# EAGLE board 32U4_Breakout-Panel-v12 (EAGLE 6.5.0), part 1 of 3
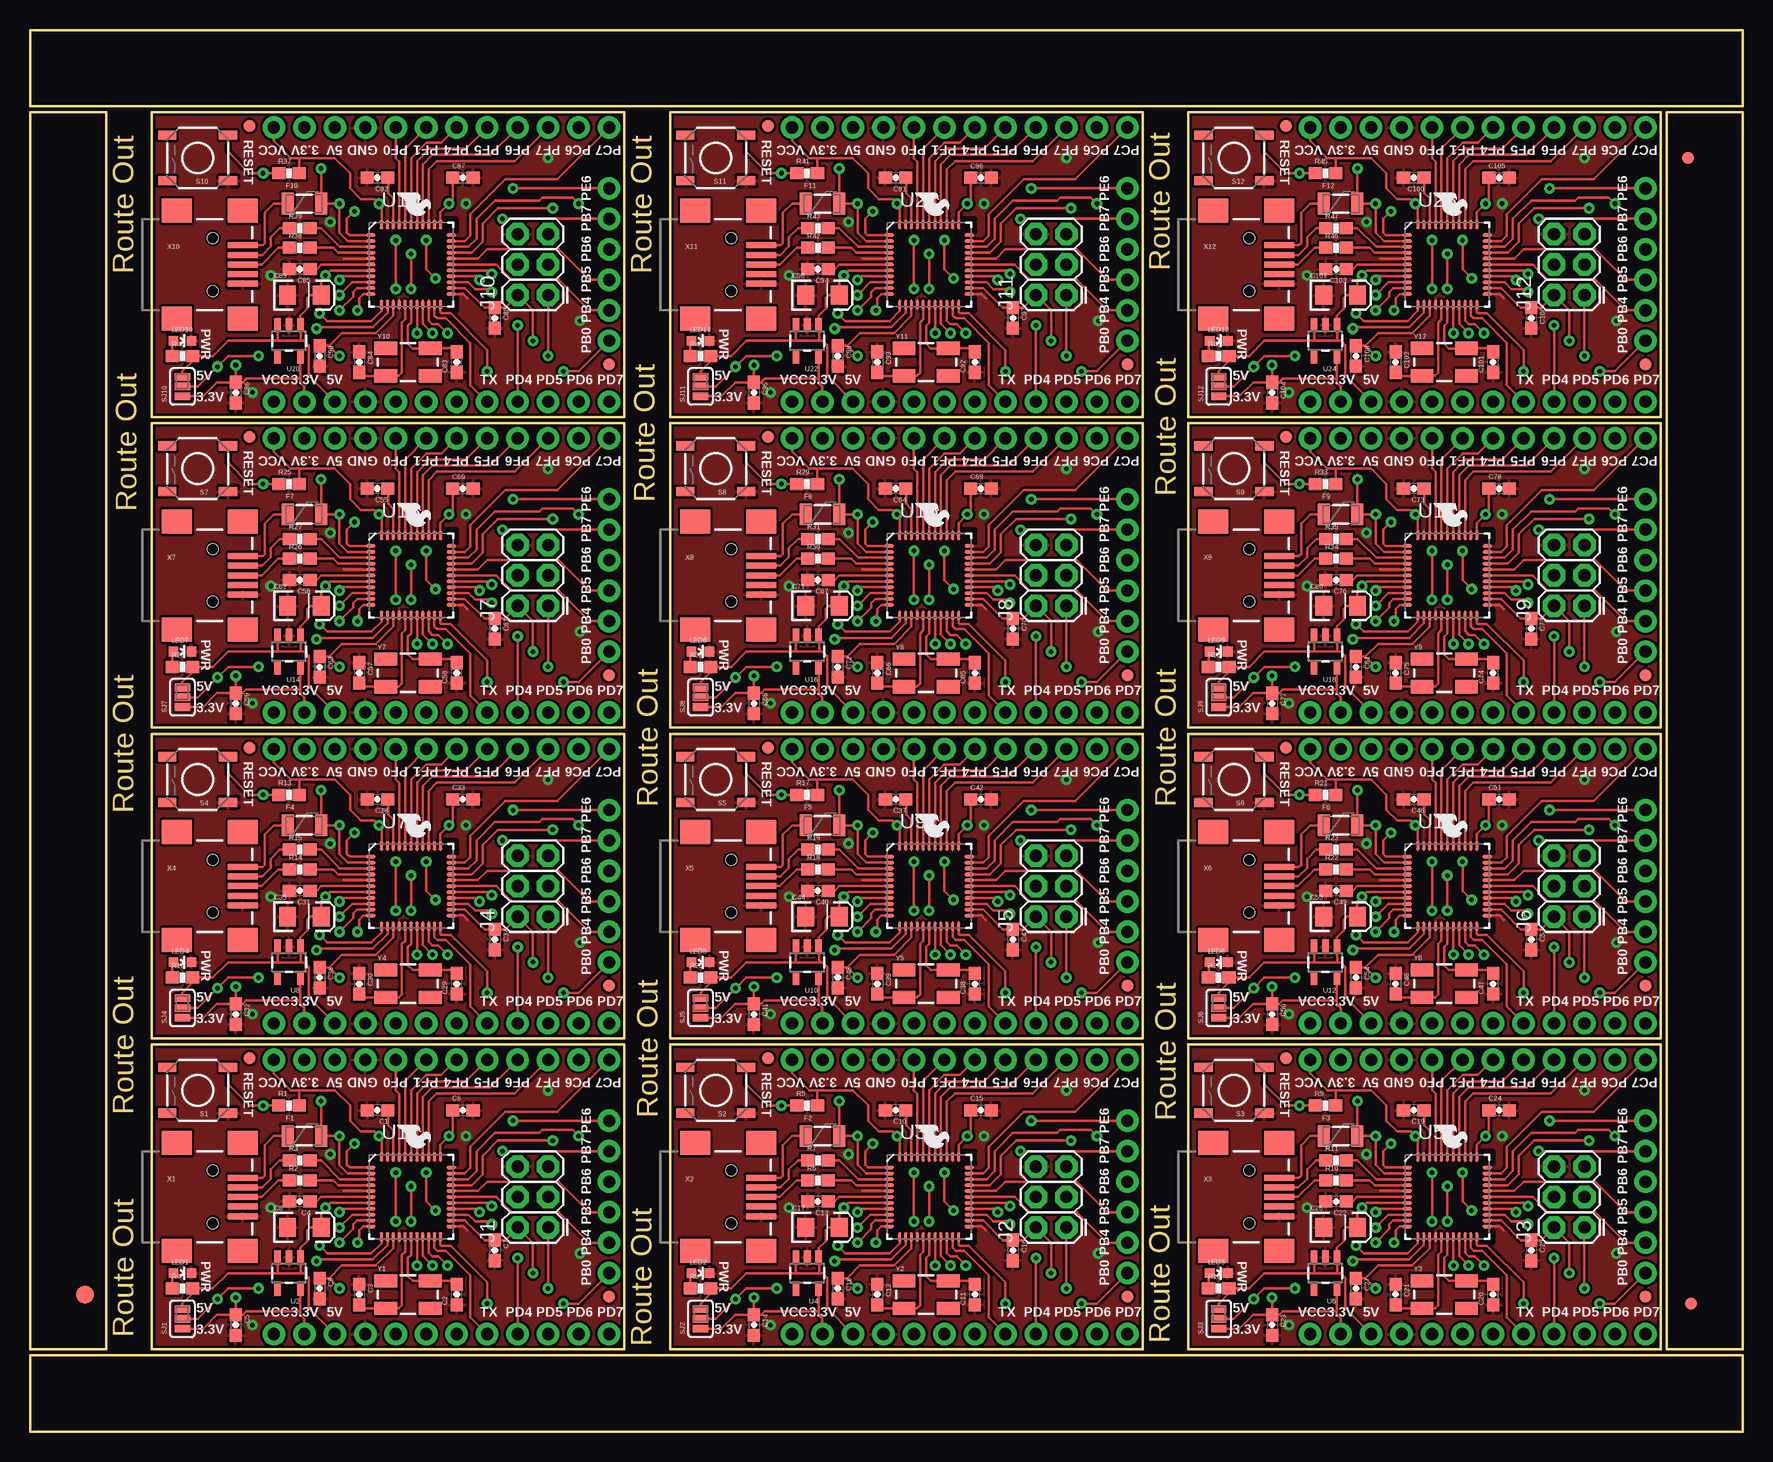
[diagram p0: board, top side]
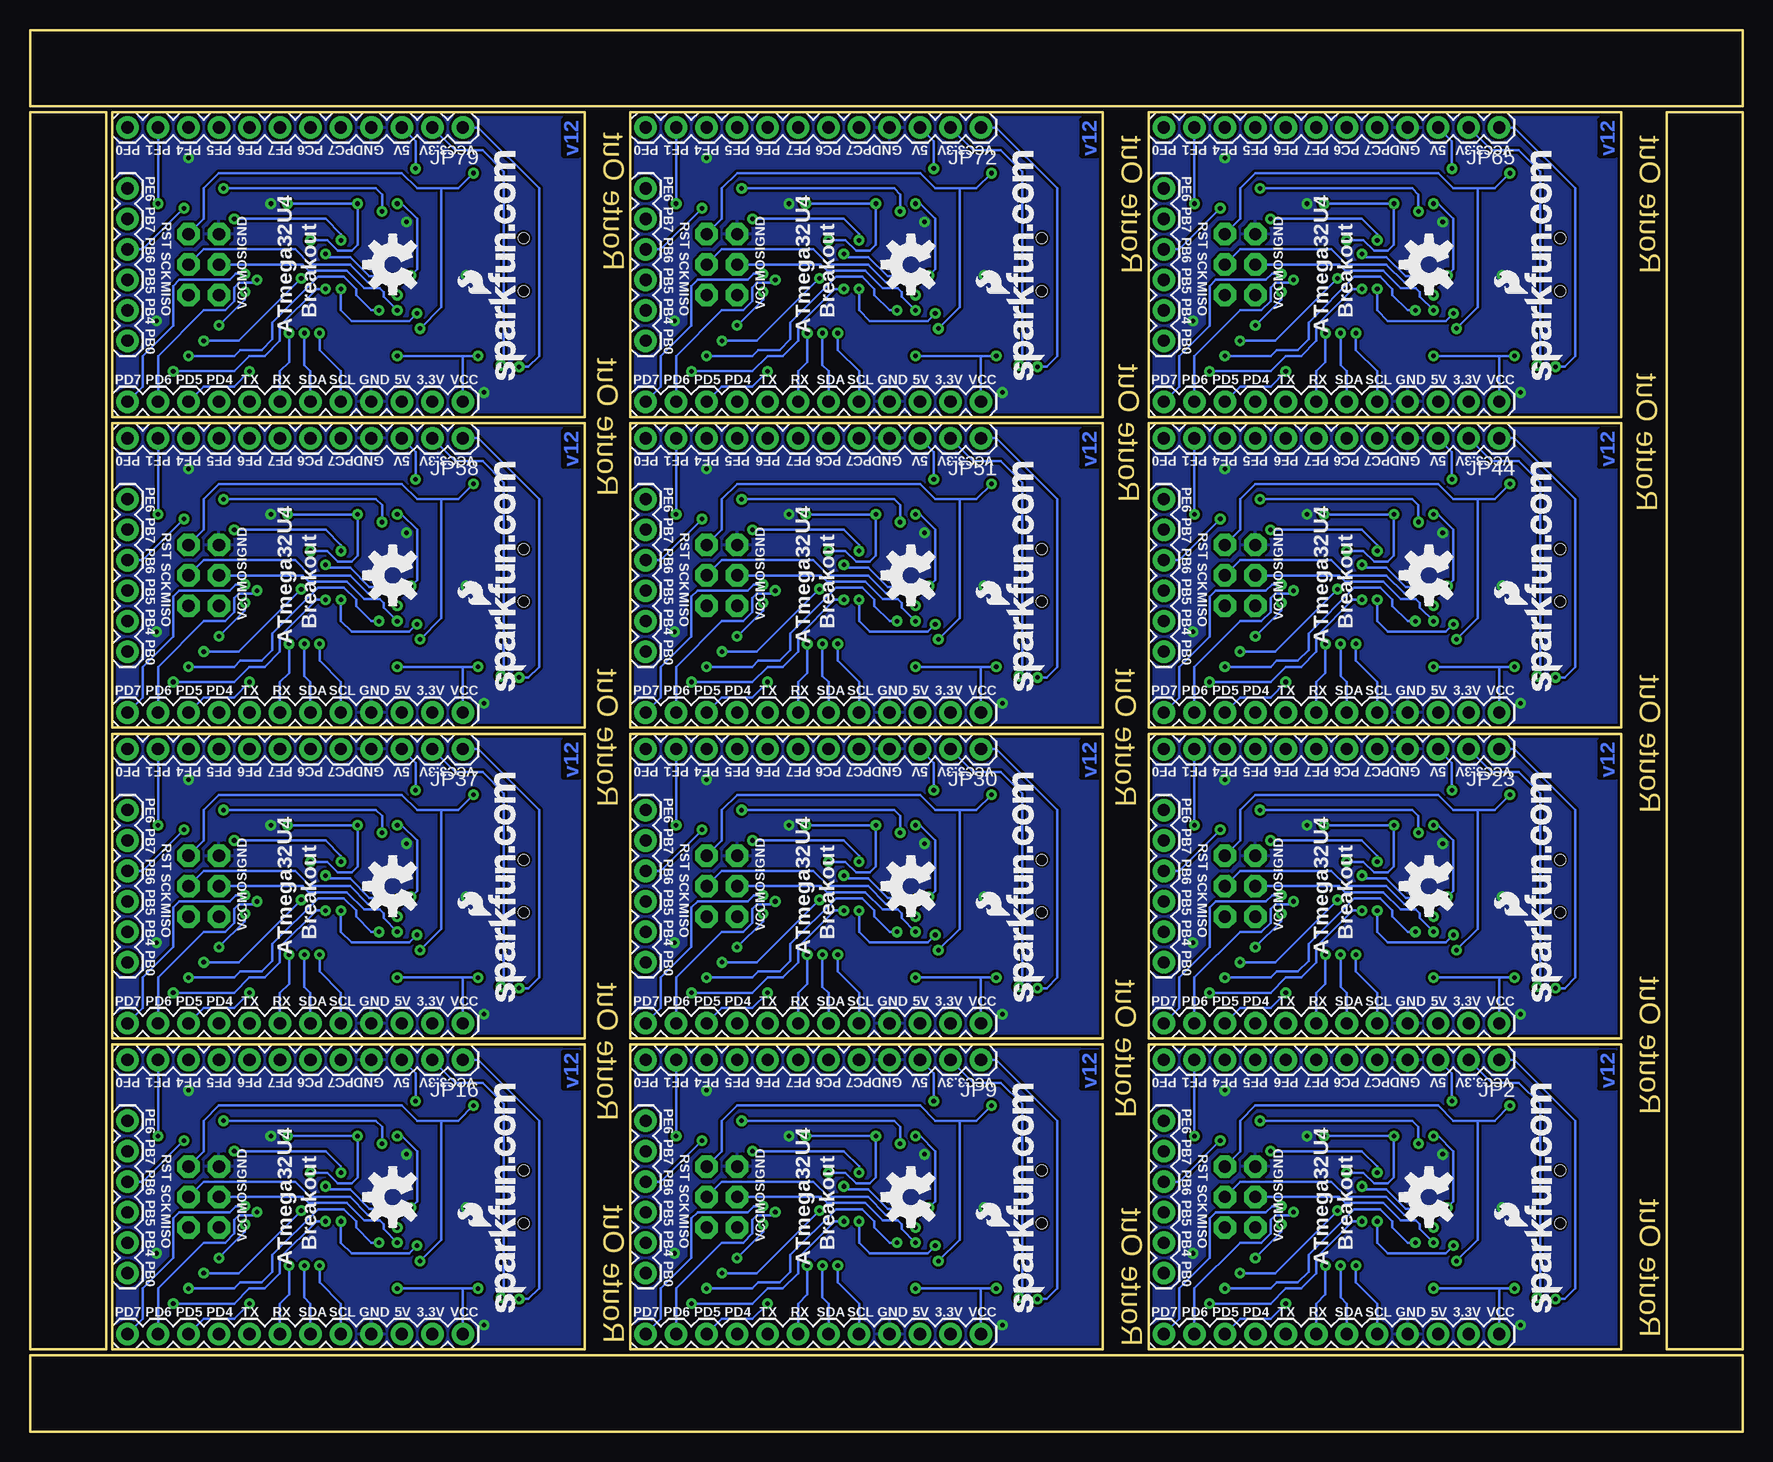
[diagram p1: board, bottom side, seen from below]

Size 142.75 x 116.84 mm. Coordinates in mm from the lower left corner, seen from the top.
Outline: 66 segments
Copper layers (1*16): Top 0.035mm / dielectric 1.5mm / Bottom 0.035mm
Design rules "SparkFun": minimum track width 7mil, minimum drill 15mil, track to track 8mil, track to pad 8mil, pad to pad 8mil, via to via 8mil, smd to smd 8mil, copper to edge 8mil, drill to drill 8mil, minimum pad ring 12mil, minimum via ring 10mil, stop-mask expansion 4mil, vias tented up to drill 20mil, thermal gap 10mil
tRestrict: area 34.5,22.4 to 35.6,23.4; area 29.6,22.2 to 30,22.4; area 33.5,22.2 to 33.9,22.4; area 34.4,21.8 to 34.5,22.2; area 28.8,19.8 to 29,20.3; area 34.5,15.7 to 35.6,16.8; area 27.9,15.7 to 29,16.8; area 27.9,22.4 to 29,23.4; area 34.4,17 to 34.5,17.3; area 77.7,22.4 to 78.7,23.4; area 72.8,22.2 to 73.2,22.4; area 76.7,22.2 to 77.1,22.4; 96 more areas

## Footprints (pad centres in the part's own frame; a part is rotated, then mirrored left to right if it is on the bottom)
0603-CAP = smd 1.1 x 1: 1 -0.85,0; 2 0.85,0
EIA3216 = smd 1.4 x 1.6: A 1.4,0; C -1.4,0
FIDUCIAL-1.5X3 = smd 1.5 x 1.5: 1 0,0
FIDUCIAL-1X2 = smd 1 x 1: 1 0,0
PTC-1206 = smd 1 x 1.8: 1 -1.4,0; 2 1.4,0
2X3 = drill 1.016 pad 1.88 octagon: 1 0,0; 2 0,2.54; 3 2.54,0; 4 2.54,2.54; 5 5.08,0; 6 5.08,2.54
1X12 = drill 1.016 pad 1.88: 1 0,0; 2 2.54,0; 3 5.08,0; 4 7.62,0; 5 10.16,0; 6 12.7,0; 7 15.24,0; 8 17.78,0; 9 20.32,0; 10 22.86,0; 11 25.4,0; 12 27.94,0
1X06 = drill 1.016 pad 1.88: 1 0,0; 2 2.54,0; 3 5.08,0; 4 7.62,0; 5 10.16,0; 6 12.7,0
LED-0603 = smd 0.8 x 0.8: A 0,-0.75; C 0,0.75
0603-RES = smd 1.1 x 1: 1 -0.85,0; 2 0.85,0
TACTILE_SWITCH_SMD = smd 1.524 x 0.762: 1 -2.54,1.905; 2 2.54,1.905; 3 -2.54,-1.905; 4 2.54,-1.905
SJ_3_PASTE2&3 = smd 0.635 x 1.27: 1 -0.813,0; 2 0,0; 3 0.813,0
QFN-44-NOPAD_1:1-LESS_PASTE = smd 0.8 x 0.3: 1 -3.337,2.458; 2 -3.337,1.958; 3 -3.337,1.479; 4 -3.337,0.979; 5 -3.337,0.5; 6 -3.337,0; 7 -3.337,-0.5; 8 -3.337,-0.979; 9 -3.337,-1.479; 10 -3.337,-1.958; 11 -3.337,-2.458; 23 3.337,-2.458; 24 3.337,-1.958; 25 3.337,-1.479; 26 3.337,-0.979; 27 3.337,-0.5; 28 3.337,0; 29 3.337,0.5; 30 3.337,0.979; 31 3.337,1.479; 32 3.337,1.958; 33 3.337,2.458 | smd 0.3 x 0.8: 12 -2.458,-3.337; 13 -1.958,-3.337; 14 -1.479,-3.337; 15 -0.979,-3.337; 16 -0.5,-3.337; 17 0,-3.337; 18 0.5,-3.337; 19 0.979,-3.337; 20 1.479,-3.337; 21 1.958,-3.337; 22 2.458,-3.337; 34 2.458,3.337; 35 1.958,3.337; 36 1.479,3.337; 37 0.979,3.337; 38 0.5,3.337; 39 0,3.337; 40 -0.5,3.337; 41 -0.979,3.337; 42 -1.479,3.337; 43 -1.958,3.337; 44 -2.458,3.337
SOT23-5 = smd 0.55 x 1.2: 1 -0.95,-1.3; 2 0,-1.3; 3 0.95,-1.3; 4 0.95,1.3; 5 -0.95,1.3
USB-MINIB = smd 2.5 x 0.5: D+ 2.5,0; D- 2.5,0.8; GND 2.5,-1.6; ID 2.5,-0.8; VBUS 2.5,1.6 | smd 2.5 x 2: MTN1 -3,4.5; MTN2 2.5,4.5; MTN3 -3,-4.5; MTN4 2.5,-4.5 | hole 0.9: 0,2.2; 0,-2.2
CRYSTAL-SMD-5X3 = smd 1.9 x 1.1: 1 -1.85,-1.15; 2 1.85,-1.15; 3 1.85,1.15; 4 -1.85,1.15

## Placement (x,y rotation side)
C1  0.1uF  [0603-CAP]  28.96,26.8 180 top
C2  18pF  [0603-CAP]  35.56,11.43 90 top
C3  18pF  [0603-CAP]  27.43,11.43 270 top
C4  1uF  [0603-CAP]  22.48,19.18 180 top
C5  1uF  [0603-CAP]  17.14,8.89 270 top
C6  0.1uF  [0603-CAP]  36.07,26.8 0 top
C7  0.1uF  [0603-CAP]  38.73,15.11 270 top
C8  10uF  [EIA3216]  22.86,17.02 0 top
C9  0.1uF  [0603-CAP]  24.13,11.94 270 top
C10  0.1uF  [0603-CAP]  72.14,26.8 180 top
C11  18pF  [0603-CAP]  78.74,11.43 90 top
C12  18pF  [0603-CAP]  70.61,11.43 270 top
C13  1uF  [0603-CAP]  65.66,19.18 180 top
C14  1uF  [0603-CAP]  60.33,8.89 270 top
C15  0.1uF  [0603-CAP]  79.25,26.8 0 top
C16  0.1uF  [0603-CAP]  81.92,15.11 270 top
C17  10uF  [EIA3216]  66.04,17.02 0 top
C18  0.1uF  [0603-CAP]  67.31,11.94 270 top
C19  0.1uF  [0603-CAP]  115.32,26.8 180 top
C20  18pF  [0603-CAP]  121.92,11.43 90 top
C21  18pF  [0603-CAP]  113.79,11.43 270 top
C22  1uF  [0603-CAP]  108.84,19.18 180 top
C23  1uF  [0603-CAP]  103.5,8.89 270 top
C24  0.1uF  [0603-CAP]  122.43,26.8 0 top
C25  0.1uF  [0603-CAP]  125.09,15.11 270 top
C26  10uF  [EIA3216]  109.22,17.02 0 top
C27  0.1uF  [0603-CAP]  110.49,11.94 270 top
C28  0.1uF  [0603-CAP]  28.96,52.7 180 top
C29  18pF  [0603-CAP]  35.56,37.34 90 top
C30  18pF  [0603-CAP]  27.43,37.34 270 top
C31  1uF  [0603-CAP]  22.48,45.09 180 top
C32  1uF  [0603-CAP]  17.14,34.8 270 top
C33  0.1uF  [0603-CAP]  36.07,52.7 0 top
C34  0.1uF  [0603-CAP]  38.73,41.02 270 top
C35  10uF  [EIA3216]  22.86,42.93 0 top
C36  0.1uF  [0603-CAP]  24.13,37.85 270 top
C37  0.1uF  [0603-CAP]  72.14,52.7 180 top
C38  18pF  [0603-CAP]  78.74,37.34 90 top
C39  18pF  [0603-CAP]  70.61,37.34 270 top
C40  1uF  [0603-CAP]  65.66,45.09 180 top
C41  1uF  [0603-CAP]  60.33,34.8 270 top
C42  0.1uF  [0603-CAP]  79.25,52.7 0 top
C43  0.1uF  [0603-CAP]  81.92,41.02 270 top
C44  10uF  [EIA3216]  66.04,42.93 0 top
C45  0.1uF  [0603-CAP]  67.31,37.85 270 top
C46  0.1uF  [0603-CAP]  115.32,52.7 180 top
C47  18pF  [0603-CAP]  121.92,37.34 90 top
C48  18pF  [0603-CAP]  113.79,37.34 270 top
C49  1uF  [0603-CAP]  108.84,45.09 180 top
C50  1uF  [0603-CAP]  103.5,34.8 270 top
C51  0.1uF  [0603-CAP]  122.43,52.7 0 top
C52  0.1uF  [0603-CAP]  125.09,41.02 270 top
C53  10uF  [EIA3216]  109.22,42.93 0 top
C54  0.1uF  [0603-CAP]  110.49,37.85 270 top
C55  0.1uF  [0603-CAP]  28.96,78.61 180 top
C56  18pF  [0603-CAP]  35.56,63.25 90 top
C57  18pF  [0603-CAP]  27.43,63.25 270 top
C58  1uF  [0603-CAP]  22.48,70.99 180 top
C59  1uF  [0603-CAP]  17.14,60.71 270 top
C60  0.1uF  [0603-CAP]  36.07,78.61 0 top
C61  0.1uF  [0603-CAP]  38.73,66.93 270 top
C62  10uF  [EIA3216]  22.86,68.83 0 top
C63  0.1uF  [0603-CAP]  24.13,63.75 270 top
C64  0.1uF  [0603-CAP]  72.14,78.61 180 top
C65  18pF  [0603-CAP]  78.74,63.25 90 top
C66  18pF  [0603-CAP]  70.61,63.25 270 top
C67  1uF  [0603-CAP]  65.66,70.99 180 top
C68  1uF  [0603-CAP]  60.33,60.71 270 top
C69  0.1uF  [0603-CAP]  79.25,78.61 0 top
C70  0.1uF  [0603-CAP]  81.92,66.93 270 top
C71  10uF  [EIA3216]  66.04,68.83 0 top
C72  0.1uF  [0603-CAP]  67.31,63.75 270 top
C73  0.1uF  [0603-CAP]  115.32,78.61 180 top
C74  18pF  [0603-CAP]  121.92,63.25 90 top
C75  18pF  [0603-CAP]  113.79,63.25 270 top
C76  1uF  [0603-CAP]  108.84,70.99 180 top
C77  1uF  [0603-CAP]  103.5,60.71 270 top
C78  0.1uF  [0603-CAP]  122.43,78.61 0 top
C79  0.1uF  [0603-CAP]  125.09,66.93 270 top
C80  10uF  [EIA3216]  109.22,68.83 0 top
C81  0.1uF  [0603-CAP]  110.49,63.75 270 top
C82  0.1uF  [0603-CAP]  28.96,104.52 180 top
C83  18pF  [0603-CAP]  35.56,89.15 90 top
C84  18pF  [0603-CAP]  27.43,89.15 270 top
C85  1uF  [0603-CAP]  22.48,96.9 180 top
C86  1uF  [0603-CAP]  17.14,86.61 270 top
C87  0.1uF  [0603-CAP]  36.07,104.52 0 top
C88  0.1uF  [0603-CAP]  38.73,92.84 270 top
C89  10uF  [EIA3216]  22.86,94.74 0 top
C90  0.1uF  [0603-CAP]  24.13,89.66 270 top
C91  0.1uF  [0603-CAP]  72.14,104.52 180 top
C92  18pF  [0603-CAP]  78.74,89.15 90 top
C93  18pF  [0603-CAP]  70.61,89.15 270 top
C94  1uF  [0603-CAP]  65.66,96.9 180 top
C95  1uF  [0603-CAP]  60.33,86.61 270 top
C96  0.1uF  [0603-CAP]  79.25,104.52 0 top
C97  0.1uF  [0603-CAP]  81.92,92.84 270 top
C98  10uF  [EIA3216]  66.04,94.74 0 top
C99  0.1uF  [0603-CAP]  67.31,89.66 270 top
C100  0.1uF  [0603-CAP]  115.32,104.52 180 top
C101  18pF  [0603-CAP]  121.92,89.15 90 top
C102  18pF  [0603-CAP]  113.79,89.15 270 top
C103  1uF  [0603-CAP]  108.84,96.9 180 top
C104  1uF  [0603-CAP]  103.5,86.61 270 top
C105  0.1uF  [0603-CAP]  122.43,104.52 0 top
C106  0.1uF  [0603-CAP]  125.09,92.84 270 top
C107  10uF  [EIA3216]  109.22,94.74 0 top
C108  0.1uF  [0603-CAP]  110.49,89.66 270 top
E$1  [FIDUCIAL-1.5X3]  4.57,11.43 0 top
E$4  [FIDUCIAL-1X2]  138.43,10.67 0 top
E$5  [FIDUCIAL-1X2]  138.18,106.17 180 top
F1  PTCSMD  [PTC-1206]  22.86,24.64 0 top
F2  PTCSMD  [PTC-1206]  66.04,24.64 0 top
F3  PTCSMD  [PTC-1206]  109.22,24.64 0 top
F4  PTCSMD  [PTC-1206]  22.86,50.55 0 top
F5  PTCSMD  [PTC-1206]  66.04,50.55 0 top
F6  PTCSMD  [PTC-1206]  109.22,50.55 0 top
F7  PTCSMD  [PTC-1206]  22.86,76.45 0 top
F8  PTCSMD  [PTC-1206]  66.04,76.45 0 top
F9  PTCSMD  [PTC-1206]  109.22,76.45 0 top
F10  PTCSMD  [PTC-1206]  22.86,102.36 0 top
F11  PTCSMD  [PTC-1206]  66.04,102.36 0 top
F12  PTCSMD  [PTC-1206]  109.22,102.36 0 top
J1  AVR_SPI_PRG  [2X3]  43.18,17.02 90 top
J2  AVR_SPI_PRG  [2X3]  86.36,17.02 90 top
J3  AVR_SPI_PRG  [2X3]  129.54,17.02 90 top
J4  AVR_SPI_PRG  [2X3]  43.18,42.93 90 top
J5  AVR_SPI_PRG  [2X3]  86.36,42.93 90 top
J6  AVR_SPI_PRG  [2X3]  129.54,42.93 90 top
J7  AVR_SPI_PRG  [2X3]  43.18,68.83 90 top
J8  AVR_SPI_PRG  [2X3]  86.36,68.83 90 top
J9  AVR_SPI_PRG  [2X3]  129.54,68.83 90 top
J10  AVR_SPI_PRG  [2X3]  43.18,94.74 90 top
J11  AVR_SPI_PRG  [2X3]  86.36,94.74 90 top
J12  AVR_SPI_PRG  [2X3]  129.54,94.74 90 top
JP1  M12PTH  [1X12]  20.32,8.13 180 bottom
JP2  M12PTH  [1X12]  20.32,30.99 180 bottom
JP3  [1X06]  48.26,13.21 90 bottom
JP4  M12PTH  [1X12]  63.5,8.13 180 bottom
JP5  LOGO-SFESK  [SFE-LOGO-FLAME]  30.61,25.53 270 top
JP6  FIDUCIAL1X2  [FIDUCIAL-1X2]  18.3,31.11 0 top
JP7  FIDUCIAL1X2  [FIDUCIAL-1X2]  48.26,11.25 0 top
JP8  LOGO-SFENEW  [SFE-NEW-WEBLOGO]  15.05,9.96 90 bottom
JP9  M12PTH  [1X12]  63.5,30.99 180 bottom
JP10  [1X06]  91.44,13.21 90 bottom
JP11  LOGO-SFESK  [SFE-LOGO-FLAME]  73.79,25.53 270 top
JP12  FIDUCIAL1X2  [FIDUCIAL-1X2]  61.48,31.11 0 top
JP13  FIDUCIAL1X2  [FIDUCIAL-1X2]  91.44,11.25 0 top
JP14  LOGO-SFENEW  [SFE-NEW-WEBLOGO]  58.23,9.96 90 bottom
JP15  M12PTH  [1X12]  106.68,8.13 180 bottom
JP16  M12PTH  [1X12]  106.68,30.99 180 bottom
JP17  [1X06]  134.62,13.21 90 bottom
JP18  LOGO-SFESK  [SFE-LOGO-FLAME]  116.97,25.53 270 top
JP19  FIDUCIAL1X2  [FIDUCIAL-1X2]  104.66,31.11 0 top
JP20  FIDUCIAL1X2  [FIDUCIAL-1X2]  134.62,11.25 0 top
JP21  LOGO-SFENEW  [SFE-NEW-WEBLOGO]  101.41,9.96 90 bottom
JP22  M12PTH  [1X12]  20.32,34.04 180 bottom
JP23  M12PTH  [1X12]  20.32,56.9 180 bottom
JP24  [1X06]  48.26,39.12 90 bottom
JP25  LOGO-SFESK  [SFE-LOGO-FLAME]  30.61,51.44 270 top
JP26  FIDUCIAL1X2  [FIDUCIAL-1X2]  18.3,57.02 0 top
JP27  FIDUCIAL1X2  [FIDUCIAL-1X2]  48.26,37.16 0 top
JP28  LOGO-SFENEW  [SFE-NEW-WEBLOGO]  15.05,35.86 90 bottom
JP29  M12PTH  [1X12]  63.5,34.04 180 bottom
JP30  M12PTH  [1X12]  63.5,56.9 180 bottom
JP31  [1X06]  91.44,39.12 90 bottom
JP32  LOGO-SFESK  [SFE-LOGO-FLAME]  73.79,51.44 270 top
JP33  FIDUCIAL1X2  [FIDUCIAL-1X2]  61.48,57.02 0 top
JP34  FIDUCIAL1X2  [FIDUCIAL-1X2]  91.44,37.16 0 top
JP35  LOGO-SFENEW  [SFE-NEW-WEBLOGO]  58.23,35.86 90 bottom
JP36  M12PTH  [1X12]  106.68,34.04 180 bottom
JP37  M12PTH  [1X12]  106.68,56.9 180 bottom
JP38  [1X06]  134.62,39.12 90 bottom
JP39  LOGO-SFESK  [SFE-LOGO-FLAME]  116.97,51.44 270 top
JP40  FIDUCIAL1X2  [FIDUCIAL-1X2]  104.66,57.02 0 top
JP41  FIDUCIAL1X2  [FIDUCIAL-1X2]  134.62,37.16 0 top
JP42  LOGO-SFENEW  [SFE-NEW-WEBLOGO]  101.41,35.86 90 bottom
JP43  M12PTH  [1X12]  20.32,59.94 180 bottom
JP44  M12PTH  [1X12]  20.32,82.8 180 bottom
JP45  [1X06]  48.26,65.02 90 bottom
JP46  LOGO-SFESK  [SFE-LOGO-FLAME]  30.61,77.34 270 top
JP47  FIDUCIAL1X2  [FIDUCIAL-1X2]  18.3,82.93 0 top
JP48  FIDUCIAL1X2  [FIDUCIAL-1X2]  48.26,63.07 0 top
JP49  LOGO-SFENEW  [SFE-NEW-WEBLOGO]  15.05,61.77 90 bottom
JP50  M12PTH  [1X12]  63.5,59.94 180 bottom
JP51  M12PTH  [1X12]  63.5,82.8 180 bottom
JP52  [1X06]  91.44,65.02 90 bottom
JP53  LOGO-SFESK  [SFE-LOGO-FLAME]  73.79,77.34 270 top
JP54  FIDUCIAL1X2  [FIDUCIAL-1X2]  61.48,82.93 0 top
JP55  FIDUCIAL1X2  [FIDUCIAL-1X2]  91.44,63.07 0 top
JP56  LOGO-SFENEW  [SFE-NEW-WEBLOGO]  58.23,61.77 90 bottom
JP57  M12PTH  [1X12]  106.68,59.94 180 bottom
JP58  M12PTH  [1X12]  106.68,82.8 180 bottom
JP59  [1X06]  134.62,65.02 90 bottom
JP60  LOGO-SFESK  [SFE-LOGO-FLAME]  116.97,77.34 270 top
JP61  FIDUCIAL1X2  [FIDUCIAL-1X2]  104.66,82.93 0 top
JP62  FIDUCIAL1X2  [FIDUCIAL-1X2]  134.62,63.07 0 top
JP63  LOGO-SFENEW  [SFE-NEW-WEBLOGO]  101.41,61.77 90 bottom
JP64  M12PTH  [1X12]  20.32,85.85 180 bottom
JP65  M12PTH  [1X12]  20.32,108.71 180 bottom
JP66  [1X06]  48.26,90.93 90 bottom
JP67  LOGO-SFESK  [SFE-LOGO-FLAME]  30.61,103.25 270 top
JP68  FIDUCIAL1X2  [FIDUCIAL-1X2]  18.3,108.84 0 top
JP69  FIDUCIAL1X2  [FIDUCIAL-1X2]  48.26,88.98 0 top
JP70  LOGO-SFENEW  [SFE-NEW-WEBLOGO]  15.05,87.68 90 bottom
JP71  M12PTH  [1X12]  63.5,85.85 180 bottom
JP72  M12PTH  [1X12]  63.5,108.71 180 bottom
JP73  [1X06]  91.44,90.93 90 bottom
JP74  LOGO-SFESK  [SFE-LOGO-FLAME]  73.79,103.25 270 top
JP75  FIDUCIAL1X2  [FIDUCIAL-1X2]  61.48,108.84 0 top
JP76  FIDUCIAL1X2  [FIDUCIAL-1X2]  91.44,88.98 0 top
JP77  LOGO-SFENEW  [SFE-NEW-WEBLOGO]  58.23,87.68 90 bottom
JP78  M12PTH  [1X12]  106.68,85.85 180 bottom
JP79  M12PTH  [1X12]  106.68,108.71 180 bottom
JP80  [1X06]  134.62,90.93 90 bottom
JP81  LOGO-SFESK  [SFE-LOGO-FLAME]  116.97,103.25 270 top
JP82  FIDUCIAL1X2  [FIDUCIAL-1X2]  104.66,108.84 0 top
JP83  FIDUCIAL1X2  [FIDUCIAL-1X2]  134.62,88.98 0 top
JP84  LOGO-SFENEW  [SFE-NEW-WEBLOGO]  101.41,87.68 90 bottom
LED1  Power  [LED-0603]  12.7,13.21 270 top
LED2  Power  [LED-0603]  55.88,13.21 270 top
LED3  Power  [LED-0603]  99.06,13.21 270 top
LED4  Power  [LED-0603]  12.7,39.12 270 top
LED5  Power  [LED-0603]  55.88,39.12 270 top
LED6  Power  [LED-0603]  99.06,39.12 270 top
LED7  Power  [LED-0603]  12.7,65.02 270 top
LED8  Power  [LED-0603]  55.88,65.02 270 top
LED9  Power  [LED-0603]  99.06,65.02 270 top
LED10  Power  [LED-0603]  12.7,90.93 270 top
LED11  Power  [LED-0603]  55.88,90.93 270 top
LED12  Power  [LED-0603]  99.06,90.93 270 top
R1  10k  [0603-RES]  21.59,27.18 0 top
R2  22  [0603-RES]  22.48,20.95 0 top
R3  22  [0603-RES]  22.48,22.61 0 top
R4  1k  [0603-RES]  12.7,11.94 0 top
R5  10k  [0603-RES]  64.77,27.18 0 top
R6  22  [0603-RES]  65.66,20.95 0 top
R7  22  [0603-RES]  65.66,22.61 0 top
R8  1k  [0603-RES]  55.88,11.94 0 top
R9  10k  [0603-RES]  107.95,27.18 0 top
R10  22  [0603-RES]  108.84,20.95 0 top
R11  22  [0603-RES]  108.84,22.61 0 top
R12  1k  [0603-RES]  99.06,11.94 0 top
R13  10k  [0603-RES]  21.59,53.09 0 top
R14  22  [0603-RES]  22.48,46.86 0 top
R15  22  [0603-RES]  22.48,48.51 0 top
R16  1k  [0603-RES]  12.7,37.85 0 top
R17  10k  [0603-RES]  64.77,53.09 0 top
R18  22  [0603-RES]  65.66,46.86 0 top
R19  22  [0603-RES]  65.66,48.51 0 top
R20  1k  [0603-RES]  55.88,37.85 0 top
R21  10k  [0603-RES]  107.95,53.09 0 top
R22  22  [0603-RES]  108.84,46.86 0 top
R23  22  [0603-RES]  108.84,48.51 0 top
R24  1k  [0603-RES]  99.06,37.85 0 top
R25  10k  [0603-RES]  21.59,78.99 0 top
R26  22  [0603-RES]  22.48,72.77 0 top
R27  22  [0603-RES]  22.48,74.42 0 top
R28  1k  [0603-RES]  12.7,63.75 0 top
R29  10k  [0603-RES]  64.77,78.99 0 top
R30  22  [0603-RES]  65.66,72.77 0 top
R31  22  [0603-RES]  65.66,74.42 0 top
R32  1k  [0603-RES]  55.88,63.75 0 top
R33  10k  [0603-RES]  107.95,78.99 0 top
R34  22  [0603-RES]  108.84,72.77 0 top
R35  22  [0603-RES]  108.84,74.42 0 top
R36  1k  [0603-RES]  99.06,63.75 0 top
R37  10k  [0603-RES]  21.59,104.9 0 top
R38  22  [0603-RES]  22.48,98.68 0 top
R39  22  [0603-RES]  22.48,100.33 0 top
R40  1k  [0603-RES]  12.7,89.66 0 top
R41  10k  [0603-RES]  64.77,104.9 0 top
R42  22  [0603-RES]  65.66,98.68 0 top
R43  22  [0603-RES]  65.66,100.33 0 top
R44  1k  [0603-RES]  55.88,89.66 0 top
R45  10k  [0603-RES]  107.95,104.9 0 top
R46  22  [0603-RES]  108.84,98.68 0 top
R47  22  [0603-RES]  108.84,100.33 0 top
R48  1k  [0603-RES]  99.06,89.66 0 top
S1  SWITCH-SMD  [TACTILE_SWITCH_SMD]  13.97,28.45 180 top
S2  SWITCH-SMD  [TACTILE_SWITCH_SMD]  57.15,28.45 180 top
S3  SWITCH-SMD  [TACTILE_SWITCH_SMD]  100.33,28.45 180 top
S4  SWITCH-SMD  [TACTILE_SWITCH_SMD]  13.97,54.36 180 top
S5  SWITCH-SMD  [TACTILE_SWITCH_SMD]  57.15,54.36 180 top
S6  SWITCH-SMD  [TACTILE_SWITCH_SMD]  100.33,54.36 180 top
S7  SWITCH-SMD  [TACTILE_SWITCH_SMD]  13.97,80.26 180 top
S8  SWITCH-SMD  [TACTILE_SWITCH_SMD]  57.15,80.26 180 top
S9  SWITCH-SMD  [TACTILE_SWITCH_SMD]  100.33,80.26 180 top
S10  SWITCH-SMD  [TACTILE_SWITCH_SMD]  13.97,106.17 180 top
S11  SWITCH-SMD  [TACTILE_SWITCH_SMD]  57.15,106.17 180 top
S12  SWITCH-SMD  [TACTILE_SWITCH_SMD]  100.33,106.17 180 top
SJ1  Power Select  [SJ_3_PASTE2&3]  12.7,9.4 90 top
SJ2  Power Select  [SJ_3_PASTE2&3]  55.88,9.4 90 top
SJ3  Power Select  [SJ_3_PASTE2&3]  99.06,9.4 90 top
SJ4  Power Select  [SJ_3_PASTE2&3]  12.7,35.31 90 top
SJ5  Power Select  [SJ_3_PASTE2&3]  55.88,35.31 90 top
SJ6  Power Select  [SJ_3_PASTE2&3]  99.06,35.31 90 top
SJ7  Power Select  [SJ_3_PASTE2&3]  12.7,61.21 90 top
SJ8  Power Select  [SJ_3_PASTE2&3]  55.88,61.21 90 top
SJ9  Power Select  [SJ_3_PASTE2&3]  99.06,61.21 90 top
SJ10  Power Select  [SJ_3_PASTE2&3]  12.7,87.12 90 top
SJ11  Power Select  [SJ_3_PASTE2&3]  55.88,87.12 90 top
SJ12  Power Select  [SJ_3_PASTE2&3]  99.06,87.12 90 top
U1  ATMEGA32U4  [QFN-44-NOPAD_1:1-LESS_PASTE]  31.75,19.56 0 top
U2  3.3V_REG_LDOSMD  [SOT23-5]  21.59,13.21 180 top
U3  ATMEGA32U4  [QFN-44-NOPAD_1:1-LESS_PASTE]  74.93,19.56 0 top
U4  3.3V_REG_LDOSMD  [SOT23-5]  64.77,13.21 180 top
U5  ATMEGA32U4  [QFN-44-NOPAD_1:1-LESS_PASTE]  118.11,19.56 0 top
U6  3.3V_REG_LDOSMD  [SOT23-5]  107.95,13.21 180 top
U7  ATMEGA32U4  [QFN-44-NOPAD_1:1-LESS_PASTE]  31.75,45.47 0 top
U8  3.3V_REG_LDOSMD  [SOT23-5]  21.59,39.12 180 top
U9  ATMEGA32U4  [QFN-44-NOPAD_1:1-LESS_PASTE]  74.93,45.47 0 top
U10  3.3V_REG_LDOSMD  [SOT23-5]  64.77,39.12 180 top
U11  ATMEGA32U4  [QFN-44-NOPAD_1:1-LESS_PASTE]  118.11,45.47 0 top
U12  3.3V_REG_LDOSMD  [SOT23-5]  107.95,39.12 180 top
U13  ATMEGA32U4  [QFN-44-NOPAD_1:1-LESS_PASTE]  31.75,71.37 0 top
U14  3.3V_REG_LDOSMD  [SOT23-5]  21.59,65.02 180 top
U15  ATMEGA32U4  [QFN-44-NOPAD_1:1-LESS_PASTE]  74.93,71.37 0 top
U16  3.3V_REG_LDOSMD  [SOT23-5]  64.77,65.02 180 top
U17  ATMEGA32U4  [QFN-44-NOPAD_1:1-LESS_PASTE]  118.11,71.37 0 top
U18  3.3V_REG_LDOSMD  [SOT23-5]  107.95,65.02 180 top
U19  ATMEGA32U4  [QFN-44-NOPAD_1:1-LESS_PASTE]  31.75,97.28 0 top
U20  3.3V_REG_LDOSMD  [SOT23-5]  21.59,90.93 180 top
U21  ATMEGA32U4  [QFN-44-NOPAD_1:1-LESS_PASTE]  74.93,97.28 0 top
U22  3.3V_REG_LDOSMD  [SOT23-5]  64.77,90.93 180 top
U23  ATMEGA32U4  [QFN-44-NOPAD_1:1-LESS_PASTE]  118.11,97.28 0 top
U24  3.3V_REG_LDOSMD  [SOT23-5]  107.95,90.93 180 top
U$1  OSHW-LOGOM  [OSHW-LOGO-M]  69.34,19.56 90 bottom
U$2  OSHW-LOGOM  [OSHW-LOGO-M]  112.52,19.56 90 bottom
U$3  OSHW-LOGOM  [OSHW-LOGO-M]  26.16,45.47 90 bottom
U$4  OSHW-LOGOM  [OSHW-LOGO-M]  69.34,45.47 90 bottom
U$5  OSHW-LOGOM  [OSHW-LOGO-M]  112.52,45.47 90 bottom
U$6  OSHW-LOGOM  [OSHW-LOGO-M]  26.16,19.56 90 bottom
U$7  OSHW-LOGOM  [OSHW-LOGO-M]  26.16,71.37 90 bottom
U$8  OSHW-LOGOM  [OSHW-LOGO-M]  69.34,71.37 90 bottom
U$9  OSHW-LOGOM  [OSHW-LOGO-M]  112.52,71.37 90 bottom
U$10  OSHW-LOGOM  [OSHW-LOGO-M]  26.16,97.28 90 bottom
U$11  OSHW-LOGOM  [OSHW-LOGO-M]  69.34,97.28 90 bottom
U$12  OSHW-LOGOM  [OSHW-LOGO-M]  112.52,97.28 90 bottom
X1  USBSMD  [USB-MINIB]  15.24,19.56 0 top
X2  USBSMD  [USB-MINIB]  58.42,19.56 0 top
X3  USBSMD  [USB-MINIB]  101.6,19.56 0 top
X4  USBSMD  [USB-MINIB]  15.24,45.47 0 top
X5  USBSMD  [USB-MINIB]  58.42,45.47 0 top
X6  USBSMD  [USB-MINIB]  101.6,45.47 0 top
X7  USBSMD  [USB-MINIB]  15.24,71.37 0 top
X8  USBSMD  [USB-MINIB]  58.42,71.37 0 top
X9  USBSMD  [USB-MINIB]  101.6,71.37 0 top
X10  USBSMD  [USB-MINIB]  15.24,97.28 0 top
X11  USBSMD  [USB-MINIB]  58.42,97.28 0 top
X12  USBSMD  [USB-MINIB]  101.6,97.28 0 top
Y1  16MHz  [CRYSTAL-SMD-5X3]  31.5,11.43 0 top
Y2  16MHz  [CRYSTAL-SMD-5X3]  74.68,11.43 0 top
Y3  16MHz  [CRYSTAL-SMD-5X3]  117.86,11.43 0 top
Y4  16MHz  [CRYSTAL-SMD-5X3]  31.5,37.34 0 top
Y5  16MHz  [CRYSTAL-SMD-5X3]  74.68,37.34 0 top
Y6  16MHz  [CRYSTAL-SMD-5X3]  117.86,37.34 0 top
Y7  16MHz  [CRYSTAL-SMD-5X3]  31.5,63.25 0 top
Y8  16MHz  [CRYSTAL-SMD-5X3]  74.68,63.25 0 top
Y9  16MHz  [CRYSTAL-SMD-5X3]  117.86,63.25 0 top
Y10  16MHz  [CRYSTAL-SMD-5X3]  31.5,89.15 0 top
Y11  16MHz  [CRYSTAL-SMD-5X3]  74.68,89.15 0 top
Y12  16MHz  [CRYSTAL-SMD-5X3]  117.86,89.15 0 top

## Library data of the parts
C1-C7 C9-C16 C18-C25 C27-C34 C36-C43 C45-C52 C54-C61 C63-C70 C72-C79 C81-C88 C90-C97 C99-C106 C108 = SparkFun-Capacitors
C8 C17 C26 C35 C44 C53 C62 C71 C80 C89 C98 C107 F1-F12 J1-J12 JP1-JP7 JP9-JP13 JP15-JP20 JP22-JP27 JP29-JP34 JP36-JP41 JP43-JP48 JP50-JP55 JP57-JP62 JP64-JP69 JP71-JP76 JP78-JP83 LED1-LED12 S1-S12 SJ1-SJ12 U2 U4 U6 U8 U10 U12 U14 U16 U18 U20 U22 U24 U$1-U$12 X1-X12 Y1-Y12 = SparkFun
E$1 E$4 E$5 JP8 JP14 JP21 JP28 JP35 JP42 JP49 JP56 JP63 JP70 JP77 JP84 = SparkFun-Aesthetics
R1-R48 = SparkFun-Resistors
U1 U3 U5 U7 U9 U11 U13 U15 U17 U19 U21 U23 = Testing

## Nets
3.3V: C5.1 JP1.2 JP2.2 SJ1.1 U2.5
3.3V1: C14.1 JP4.2 JP9.2 SJ2.1 U4.5
3.3V2: C23.1 JP15.2 JP16.2 SJ3.1 U6.5
3.3V3: C32.1 JP22.2 JP23.2 SJ4.1 U8.5
3.3V4: C41.1 JP29.2 JP30.2 SJ5.1 U10.5
3.3V5: C50.1 JP36.2 JP37.2 SJ6.1 U12.5
3.3V6: C59.1 JP43.2 JP44.2 SJ7.1 U14.5
3.3V7: C68.1 JP50.2 JP51.2 SJ8.1 U16.5
3.3V8: C77.1 JP57.2 JP58.2 SJ9.1 U18.5
3.3V9: C86.1 JP64.2 JP65.2 SJ10.1 U20.5
3.3V10: C95.1 JP71.2 JP72.2 SJ11.1 U22.5
3.3V11: C104.1 JP78.2 JP79.2 SJ12.1 U24.5
5V: C8.A F1.2 JP1.3 JP2.3 R4.2 SJ1.3 U1.2 U1.7 U2.1 U2.3
5V1: C17.A F2.2 JP4.3 JP9.3 R8.2 SJ2.3 U3.2 U3.7 U4.1 U4.3
5V2: C26.A F3.2 JP15.3 JP16.3 R12.2 SJ3.3 U5.2 U5.7 U6.1 U6.3
5V3: C35.A F4.2 JP22.3 JP23.3 R16.2 SJ4.3 U7.2 U7.7 U8.1 U8.3
5V4: C44.A F5.2 JP29.3 JP30.3 R20.2 SJ5.3 U9.2 U9.7 U10.1 U10.3
5V5: C53.A F6.2 JP36.3 JP37.3 R24.2 SJ6.3 U11.2 U11.7 U12.1 U12.3
5V6: C62.A F7.2 JP43.3 JP44.3 R28.2 SJ7.3 U13.2 U13.7 U14.1 U14.3
5V7: C71.A F8.2 JP50.3 JP51.3 R32.2 SJ8.3 U15.2 U15.7 U16.1 U16.3
5V8: C80.A F9.2 JP57.3 JP58.3 R36.2 SJ9.3 U17.2 U17.7 U18.1 U18.3
5V9: C89.A F10.2 JP64.3 JP65.3 R40.2 SJ10.3 U19.2 U19.7 U20.1 U20.3
5V10: C98.A F11.2 JP71.3 JP72.3 R44.2 SJ11.3 U21.2 U21.7 U22.1 U22.3
5V11: C107.A F12.2 JP78.3 JP79.3 R48.2 SJ12.3 U23.2 U23.7 U24.1 U24.3
AREF: C1.1 U1.42
AREF1: C10.1 U3.42
AREF2: C19.1 U5.42
AREF3: C28.1 U7.42
AREF4: C37.1 U9.42
AREF5: C46.1 U11.42
AREF6: C55.1 U13.42
AREF7: C64.1 U15.42
AREF8: C73.1 U17.42
AREF9: C82.1 U19.42
AREF10: C91.1 U21.42
AREF11: C100.1 U23.42
D+: R2.1 X1.D+
D+1: R6.1 X2.D+
D+2: R10.1 X3.D+
D+3: R14.1 X4.D+
D+4: R18.1 X5.D+
D+5: R22.1 X6.D+
D+6: R26.1 X7.D+
D+7: R30.1 X8.D+
D+8: R34.1 X9.D+
D+9: R38.1 X10.D+
D+10: R42.1 X11.D+
D+11: R46.1 X12.D+
D-: R3.1 X1.D-
D-1: R7.1 X2.D-
D-2: R11.1 X3.D-
D-3: R15.1 X4.D-
D-4: R19.1 X5.D-
D-5: R23.1 X6.D-
D-6: R27.1 X7.D-
D-7: R31.1 X8.D-
D-8: R35.1 X9.D-
D-9: R39.1 X10.D-
D-10: R43.1 X11.D-
D-11: R47.1 X12.D-
GND: C1.2 C2.1 C3.1 C4.2 C5.2 C6.2 C7.2 C8.C C9.2 J1.6 JP1.4 JP2.4 LED1.C S1.1 U1.5 U1.15 U1.23 U1.33 U1.35 U1.43 U2.2 X1.GND
GND1: C10.2 C11.1 C12.1 C13.2 C14.2 C15.2 C16.2 C17.C C18.2 J2.6 JP4.4 JP9.4 LED2.C S2.1 U3.5 U3.15 U3.23 U3.33 U3.35 U3.43 U4.2 X2.GND
GND2: C19.2 C20.1 C21.1 C22.2 C23.2 C24.2 C25.2 C26.C C27.2 J3.6 JP15.4 JP16.4 LED3.C S3.1 U5.5 U5.15 U5.23 U5.33 U5.35 U5.43 U6.2 X3.GND
GND3: C28.2 C29.1 C30.1 C31.2 C32.2 C33.2 C34.2 C35.C C36.2 J4.6 JP22.4 JP23.4 LED4.C S4.1 U7.5 U7.15 U7.23 U7.33 U7.35 U7.43 U8.2 X4.GND
GND4: C37.2 C38.1 C39.1 C40.2 C41.2 C42.2 C43.2 C44.C C45.2 J5.6 JP29.4 JP30.4 LED5.C S5.1 U9.5 U9.15 U9.23 U9.33 U9.35 U9.43 U10.2 X5.GND
GND5: C46.2 C47.1 C48.1 C49.2 C50.2 C51.2 C52.2 C53.C C54.2 J6.6 JP36.4 JP37.4 LED6.C S6.1 U11.5 U11.15 U11.23 U11.33 U11.35 U11.43 U12.2 X6.GND
GND6: C55.2 C56.1 C57.1 C58.2 C59.2 C60.2 C61.2 C62.C C63.2 J7.6 JP43.4 JP44.4 LED7.C S7.1 U13.5 U13.15 U13.23 U13.33 U13.35 U13.43 U14.2 X7.GND
GND7: C64.2 C65.1 C66.1 C67.2 C68.2 C69.2 C70.2 C71.C C72.2 J8.6 JP50.4 JP51.4 LED8.C S8.1 U15.5 U15.15 U15.23 U15.33 U15.35 U15.43 U16.2 X8.GND
GND8: C73.2 C74.1 C75.1 C76.2 C77.2 C78.2 C79.2 C80.C C81.2 J9.6 JP57.4 JP58.4 LED9.C S9.1 U17.5 U17.15 U17.23 U17.33 U17.35 U17.43 U18.2 X9.GND
GND9: C82.2 C83.1 C84.1 C85.2 C86.2 C87.2 C88.2 C89.C C90.2 J10.6 JP64.4 JP65.4 LED10.C S10.1 U19.5 U19.15 U19.23 U19.33 U19.35 U19.43 U20.2 X10.GND
GND10: C91.2 C92.1 C93.1 C94.2 C95.2 C96.2 C97.2 C98.C C99.2 J11.6 JP71.4 JP72.4 LED11.C S11.1 U21.5 U21.15 U21.23 U21.33 U21.35 U21.43 U22.2 X11.GND
GND11: C100.2 C101.1 C102.1 C103.2 C104.2 C105.2 C106.2 C107.C C108.2 J12.6 JP78.4 JP79.4 LED12.C S12.1 U23.5 U23.15 U23.23 U23.33 U23.35 U23.43 U24.2 X12.GND
MISO: J1.1 U1.11
MISO1: J2.1 U3.11
MISO2: J3.1 U5.11
MISO3: J4.1 U7.11
MISO4: J5.1 U9.11
MISO5: J6.1 U11.11
MISO6: J7.1 U13.11
MISO7: J8.1 U15.11
MISO8: J9.1 U17.11
MISO9: J10.1 U19.11
MISO10: J11.1 U21.11
MISO11: J12.1 U23.11
MOSI: J1.4 U1.10
MOSI1: J2.4 U3.10
MOSI2: J3.4 U5.10
MOSI3: J4.4 U7.10
MOSI4: J5.4 U9.10
MOSI5: J6.4 U11.10
MOSI6: J7.4 U13.10
MOSI7: J8.4 U15.10
MOSI8: J9.4 U17.10
MOSI9: J10.4 U19.10
MOSI10: J11.4 U21.10
MOSI11: J12.4 U23.10
N$1: C11.2 U3.17 Y2.3
N$2: C2.2 U1.17 Y1.3
N$3: C3.2 U1.16 Y1.1
N$4: F1.1 X1.VBUS
N$5: C12.2 U3.16 Y2.1
N$6: R2.2 U1.4
N$7: R6.2 U3.4
N$8: R3.2 U1.3
N$9: LED1.A R4.1
N$10: R7.2 U3.3
N$11: F2.1 X2.VBUS
N$12: LED2.A R8.1
N$13: C20.2 U5.17 Y3.3
N$14: C21.2 U5.16 Y3.1
N$15: R10.2 U5.4
N$16: R11.2 U5.3
N$17: F3.1 X3.VBUS
N$18: LED3.A R12.1
N$19: C29.2 U7.17 Y4.3
N$20: C30.2 U7.16 Y4.1
N$21: R14.2 U7.4
N$22: R15.2 U7.3
N$23: F4.1 X4.VBUS
N$24: LED4.A R16.1
N$25: C38.2 U9.17 Y5.3
N$26: C39.2 U9.16 Y5.1
N$27: R18.2 U9.4
N$28: R19.2 U9.3
N$29: F5.1 X5.VBUS
N$30: LED5.A R20.1
N$31: C47.2 U11.17 Y6.3
N$32: C48.2 U11.16 Y6.1
N$33: R22.2 U11.4
N$34: R23.2 U11.3
N$35: F6.1 X6.VBUS
N$36: LED6.A R24.1
N$37: C56.2 U13.17 Y7.3
N$38: C57.2 U13.16 Y7.1
N$39: R26.2 U13.4
N$40: R27.2 U13.3
N$41: F7.1 X7.VBUS
N$42: LED7.A R28.1
N$43: C65.2 U15.17 Y8.3
N$44: C66.2 U15.16 Y8.1
N$45: R30.2 U15.4
N$46: R31.2 U15.3
N$47: F8.1 X8.VBUS
N$48: LED8.A R32.1
N$49: C74.2 U17.17 Y9.3
N$50: C75.2 U17.16 Y9.1
N$51: R34.2 U17.4
N$52: R35.2 U17.3
N$53: F9.1 X9.VBUS
N$54: LED9.A R36.1
N$55: C83.2 U19.17 Y10.3
N$56: C84.2 U19.16 Y10.1
N$57: R38.2 U19.4
N$58: R39.2 U19.3
N$59: F10.1 X10.VBUS
N$60: LED10.A R40.1
N$61: C92.2 U21.17 Y11.3
N$62: C93.2 U21.16 Y11.1
N$63: R42.2 U21.4
N$64: R43.2 U21.3
N$65: F11.1 X11.VBUS
N$66: LED11.A R44.1
N$67: C101.2 U23.17 Y12.3
N$68: C102.2 U23.16 Y12.1
N$69: R46.2 U23.4
N$70: R47.2 U23.3
N$71: F12.1 X12.VBUS
N$72: LED12.A R48.1
PB0: JP3.1 U1.8
PB1: JP10.2 U3.28
PB2: JP10.3 U3.29
PB3: JP10.4 U3.30
PB4: JP3.2 U1.28
PB5: JP3.3 U1.29
PB6: JP3.4 U1.30
PB7: JP3.5 U1.12
PB8: JP10.5 U3.12
PB9: JP10.1 U3.8
PB10: JP17.2 U5.28
PB11: JP17.3 U5.29
PB12: JP17.4 U5.30
PB13: JP17.5 U5.12
PB14: JP17.1 U5.8
PB15: JP24.2 U7.28
PB16: JP24.3 U7.29
PB17: JP24.4 U7.30
PB18: JP24.5 U7.12
PB19: JP24.1 U7.8
PB20: JP31.2 U9.28
PB21: JP31.3 U9.29
PB22: JP31.4 U9.30
PB23: JP31.5 U9.12
PB24: JP31.1 U9.8
PB25: JP38.2 U11.28
PB26: JP38.3 U11.29
PB27: JP38.4 U11.30
PB28: JP38.5 U11.12
PB29: JP38.1 U11.8
PB30: JP45.2 U13.28
PB31: JP45.3 U13.29
PB32: JP45.4 U13.30
PB33: JP45.5 U13.12
PB34: JP45.1 U13.8
PB35: JP52.2 U15.28
PB36: JP52.3 U15.29
PB37: JP52.4 U15.30
PB38: JP52.5 U15.12
PB39: JP52.1 U15.8
PB40: JP59.2 U17.28
PB41: JP59.3 U17.29
PB42: JP59.4 U17.30
PB43: JP59.5 U17.12
PB44: JP59.1 U17.8
PB45: JP66.2 U19.28
PB46: JP66.3 U19.29
PB47: JP66.4 U19.30
PB48: JP66.5 U19.12
PB49: JP66.1 U19.8
PB50: JP73.2 U21.28
PB51: JP73.3 U21.29
PB52: JP73.4 U21.30
PB53: JP73.5 U21.12
PB54: JP73.1 U21.8
PB55: JP80.2 U23.28
PB56: JP80.3 U23.29
PB57: JP80.4 U23.30
PB58: JP80.5 U23.12
PB59: JP80.1 U23.8
PC1: JP9.11 U3.31
PC2: JP9.12 U3.32
PC3: JP16.11 U5.31
PC4: JP16.12 U5.32
PC5: JP23.11 U7.31
PC6: JP2.11 U1.31
PC7: JP2.12 U1.32
PC8: JP23.12 U7.32
PC9: JP30.11 U9.31
PC10: JP30.12 U9.32
PC11: JP37.11 U11.31
PC12: JP37.12 U11.32
PC13: JP44.11 U13.31
PC14: JP44.12 U13.32
PC15: JP51.11 U15.31
PC16: JP51.12 U15.32
PC17: JP58.11 U17.31
PC18: JP58.12 U17.32
PC19: JP65.11 U19.31
PC20: JP65.12 U19.32
PC21: JP72.11 U21.31
PC22: JP72.12 U21.32
PC23: JP79.11 U23.31
PC24: JP79.12 U23.32
PD1: JP4.9 U3.25
PD2: JP4.12 U3.27
PD3: JP4.11 U3.26
PD4: JP1.9 U1.25
PD5: JP1.10 U1.22
PD6: JP1.11 U1.26
PD7: JP1.12 U1.27
PD8: JP4.10 U3.22
PD9: JP15.9 U5.25
PD10: JP15.12 U5.27
PD11: JP15.11 U5.26
PD12: JP15.10 U5.22
PD13: JP22.9 U7.25
PD14: JP22.12 U7.27
PD15: JP22.11 U7.26
PD16: JP22.10 U7.22
PD17: JP29.9 U9.25
PD18: JP29.12 U9.27
PD19: JP29.11 U9.26
PD20: JP29.10 U9.22
PD21: JP36.9 U11.25
PD22: JP36.12 U11.27
PD23: JP36.11 U11.26
PD24: JP36.10 U11.22
PD25: JP43.9 U13.25
PD26: JP43.12 U13.27
PD27: JP43.11 U13.26
PD28: JP43.10 U13.22
PD29: JP50.9 U15.25
PD30: JP50.12 U15.27
PD31: JP50.11 U15.26
PD32: JP50.10 U15.22
PD33: JP57.9 U17.25
PD34: JP57.12 U17.27
PD35: JP57.11 U17.26
PD36: JP57.10 U17.22
PD37: JP64.9 U19.25
PD38: JP64.12 U19.27
PD39: JP64.11 U19.26
PD40: JP64.10 U19.22
PD41: JP71.9 U21.25
PD42: JP71.12 U21.27
PD43: JP71.11 U21.26
PD44: JP71.10 U21.22
PD45: JP78.9 U23.25
PD46: JP78.12 U23.27
PD47: JP78.11 U23.26
PD48: JP78.10 U23.22
PE1: JP10.6 U3.1
PE2: JP17.6 U5.1
PE3: JP24.6 U7.1
PE4: JP31.6 U9.1
PE5: JP38.6 U11.1
PE6: JP3.6 U1.1
PE7: JP45.6 U13.1
PE8: JP52.6 U15.1
PE9: JP59.6 U17.1
PE10: JP66.6 U19.1
PE11: JP73.6 U21.1
PE12: JP80.6 U23.1
PF0: JP2.5 U1.41
PF1: JP2.6 U1.40
PF2: JP9.10 U3.36
PF3: JP9.9 U3.37
PF4: JP2.7 U1.39
PF5: JP2.8 U1.38
PF6: JP2.9 U1.37
PF7: JP2.10 U1.36
PF8: JP9.8 U3.38
PF9: JP9.7 U3.39
PF10: JP9.6 U3.40
PF11: JP9.5 U3.41
PF12: JP16.10 U5.36
PF13: JP16.9 U5.37
PF14: JP16.8 U5.38
PF15: JP16.7 U5.39
PF16: JP16.6 U5.40
PF17: JP16.5 U5.41
PF18: JP23.10 U7.36
PF19: JP23.9 U7.37
PF20: JP23.8 U7.38
PF21: JP23.7 U7.39
PF22: JP23.6 U7.40
PF23: JP23.5 U7.41
PF24: JP30.10 U9.36
PF25: JP30.9 U9.37
PF26: JP30.8 U9.38
PF27: JP30.7 U9.39
PF28: JP30.6 U9.40
PF29: JP30.5 U9.41
PF30: JP37.10 U11.36
PF31: JP37.9 U11.37
PF32: JP37.8 U11.38
PF33: JP37.7 U11.39
PF34: JP37.6 U11.40
PF35: JP37.5 U11.41
PF36: JP44.10 U13.36
PF37: JP44.9 U13.37
PF38: JP44.8 U13.38
PF39: JP44.7 U13.39
PF40: JP44.6 U13.40
PF41: JP44.5 U13.41
PF42: JP51.10 U15.36
PF43: JP51.9 U15.37
PF44: JP51.8 U15.38
PF45: JP51.7 U15.39
PF46: JP51.6 U15.40
PF47: JP51.5 U15.41
PF48: JP58.10 U17.36
PF49: JP58.9 U17.37
PF50: JP58.8 U17.38
PF51: JP58.7 U17.39
PF52: JP58.6 U17.40
PF53: JP58.5 U17.41
PF54: JP65.10 U19.36
PF55: JP65.9 U19.37
PF56: JP65.8 U19.38
PF57: JP65.7 U19.39
PF58: JP65.6 U19.40
PF59: JP65.5 U19.41
PF60: JP72.10 U21.36
PF61: JP72.9 U21.37
PF62: JP72.8 U21.38
PF63: JP72.7 U21.39
PF64: JP72.6 U21.40
PF65: JP72.5 U21.41
PF66: JP79.10 U23.36
PF67: JP79.9 U23.37
PF68: JP79.8 U23.38
PF69: JP79.7 U23.39
PF70: JP79.6 U23.40
PF71: JP79.5 U23.41
RST: J1.5 R1.1 S1.3 U1.13
RST1: J2.5 R5.1 S2.3 U3.13
RST2: J3.5 R9.1 S3.3 U5.13
RST3: J4.5 R13.1 S4.3 U7.13
RST4: J5.5 R17.1 S5.3 U9.13
RST5: J6.5 R21.1 S6.3 U11.13
RST6: J7.5 R25.1 S7.3 U13.13
RST7: J8.5 R29.1 S8.3 U15.13
RST8: J9.5 R33.1 S9.3 U17.13
RST9: J10.5 R37.1 S10.3 U19.13
RST10: J11.5 R41.1 S11.3 U21.13
RST11: J12.5 R45.1 S12.3 U23.13
RX: JP1.7 U1.20
RX1: JP4.7 U3.20
RX2: JP15.7 U5.20
RX3: JP22.7 U7.20
RX4: JP29.7 U9.20
RX5: JP36.7 U11.20
RX6: JP43.7 U13.20
RX7: JP50.7 U15.20
RX8: JP57.7 U17.20
RX9: JP64.7 U19.20
RX10: JP71.7 U21.20
RX11: JP78.7 U23.20
SCK: J1.3 U1.9
SCK1: J2.3 U3.9
SCK2: J3.3 U5.9
SCK3: J4.3 U7.9
SCK4: J5.3 U9.9
SCK5: J6.3 U11.9
SCK6: J7.3 U13.9
SCK7: J8.3 U15.9
SCK8: J9.3 U17.9
SCK9: J10.3 U19.9
SCK10: J11.3 U21.9
SCK11: J12.3 U23.9
SCL: JP1.5 U1.18
SCL1: JP4.5 U3.18
SCL2: JP15.5 U5.18
SCL3: JP22.5 U7.18
SCL4: JP29.5 U9.18
SCL5: JP36.5 U11.18
SCL6: JP43.5 U13.18
SCL7: JP50.5 U15.18
SCL8: JP57.5 U17.18
SCL9: JP64.5 U19.18
SCL10: JP71.5 U21.18
SCL11: JP78.5 U23.18
SDA: JP1.6 U1.19
SDA1: JP4.6 U3.19
SDA2: JP15.6 U5.19
SDA3: JP22.6 U7.19
SDA4: JP29.6 U9.19
SDA5: JP36.6 U11.19
SDA6: JP43.6 U13.19
SDA7: JP50.6 U15.19
SDA8: JP57.6 U17.19
SDA9: JP64.6 U19.19
SDA10: JP71.6 U21.19
SDA11: JP78.6 U23.19
TX: JP1.8 U1.21
TX1: JP4.8 U3.21
TX2: JP15.8 U5.21
TX3: JP22.8 U7.21
TX4: JP29.8 U9.21
TX5: JP36.8 U11.21
TX6: JP43.8 U13.21
TX7: JP50.8 U15.21
TX8: JP57.8 U17.21
TX9: JP64.8 U19.21
TX10: JP71.8 U21.21
TX11: JP78.8 U23.21
UCAP: C4.1 U1.6
UCAP1: C13.1 U3.6
UCAP2: C22.1 U5.6
UCAP3: C31.1 U7.6
UCAP4: C40.1 U9.6
UCAP5: C49.1 U11.6
UCAP6: C58.1 U13.6
UCAP7: C67.1 U15.6
UCAP8: C76.1 U17.6
UCAP9: C85.1 U19.6
UCAP10: C94.1 U21.6
UCAP11: C103.1 U23.6
VCC: C6.1 C7.1 C9.1 J1.2 JP1.1 JP2.1 R1.2 SJ1.2 U1.14 U1.24 U1.34 U1.44
VCC1: C15.1 C16.1 C18.1 J2.2 JP4.1 JP9.1 R5.2 SJ2.2 U3.14 U3.24 U3.34 U3.44
VCC2: C24.1 C25.1 C27.1 J3.2 JP15.1 JP16.1 R9.2 SJ3.2 U5.14 U5.24 U5.34 U5.44
VCC3: C33.1 C34.1 C36.1 J4.2 JP22.1 JP23.1 R13.2 SJ4.2 U7.14 U7.24 U7.34 U7.44
VCC4: C42.1 C43.1 C45.1 J5.2 JP29.1 JP30.1 R17.2 SJ5.2 U9.14 U9.24 U9.34 U9.44
VCC5: C51.1 C52.1 C54.1 J6.2 JP36.1 JP37.1 R21.2 SJ6.2 U11.14 U11.24 U11.34 U11.44
VCC6: C60.1 C61.1 C63.1 J7.2 JP43.1 JP44.1 R25.2 SJ7.2 U13.14 U13.24 U13.34 U13.44
VCC7: C69.1 C70.1 C72.1 J8.2 JP50.1 JP51.1 R29.2 SJ8.2 U15.14 U15.24 U15.34 U15.44
VCC8: C78.1 C79.1 C81.1 J9.2 JP57.1 JP58.1 R33.2 SJ9.2 U17.14 U17.24 U17.34 U17.44
VCC9: C87.1 C88.1 C90.1 J10.2 JP64.1 JP65.1 R37.2 SJ10.2 U19.14 U19.24 U19.34 U19.44
VCC10: C96.1 C97.1 C99.1 J11.2 JP71.1 JP72.1 R41.2 SJ11.2 U21.14 U21.24 U21.34 U21.44
VCC11: C105.1 C106.1 C108.1 J12.2 JP78.1 JP79.1 R45.2 SJ12.2 U23.14 U23.24 U23.34 U23.44

## Tracks (layer width: path | path; a pad name or v marks a point on that pad's centre or on a via)
3.3V  (via drill 0.38)
  Top 0.203: SJ1.1 14.43,8.59 15.58,9.74 C5.1 | JP1.2 22.86,9.4 22.54,9.72 22.54,10.03 | U2.5 22.54,10.03 | 22.54,10.03 18.03,10.03 17.74,9.74 C5.1 | C5.1 v17.14,11.18
  Bottom 0.203: JP2.2 20.95,29.08 18.67,29.08 16.89,27.3 16.89,11.43 v17.14,11.18
3.3V1  (via drill 0.38)
  Top 0.203: SJ2.1 57.61,8.59 58.76,9.74 C14.1 | JP4.2 66.04,9.4 65.72,9.72 65.72,10.03 | U4.5 65.72,10.03 | 65.72,10.03 61.21,10.03 60.92,9.74 C14.1 | C14.1 v60.33,11.18
  Bottom 0.203: JP9.2 64.14,29.08 61.85,29.08 60.07,27.3 60.07,11.43 v60.33,11.18
3.3V2  (via drill 0.38)
  Top 0.203: SJ3.1 100.79,8.59 101.94,9.74 C23.1 | JP15.2 109.22,9.4 108.9,9.72 108.9,10.03 | U6.5 108.9,10.03 | 108.9,10.03 104.39,10.03 104.1,9.74 C23.1 | C23.1 v103.5,11.18
  Bottom 0.203: JP16.2 107.31,29.08 105.03,29.08 103.25,27.3 103.25,11.43 v103.5,11.18
3.3V3  (via drill 0.38)
  Top 0.203: SJ4.1 14.43,34.49 15.58,35.65 C32.1 | JP22.2 22.86,35.31 22.54,35.63 22.54,35.94 | U8.5 22.54,35.94 | 22.54,35.94 18.03,35.94 17.74,35.65 C32.1 | C32.1 v17.14,37.08
  Bottom 0.203: JP23.2 20.95,54.99 18.67,54.99 16.89,53.21 16.89,37.34 v17.14,37.08
3.3V4  (via drill 0.38)
  Top 0.203: SJ5.1 57.61,34.49 58.76,35.65 C41.1 | JP29.2 66.04,35.31 65.72,35.63 65.72,35.94 | U10.5 65.72,35.94 | 65.72,35.94 61.21,35.94 60.92,35.65 C41.1 | C41.1 v60.33,37.08
  Bottom 0.203: JP30.2 64.14,54.99 61.85,54.99 60.07,53.21 60.07,37.34 v60.33,37.08
3.3V5  (via drill 0.38)
  Top 0.203: SJ6.1 100.79,34.49 101.94,35.65 C50.1 | JP36.2 109.22,35.31 108.9,35.63 108.9,35.94 | U12.5 108.9,35.94 | 108.9,35.94 104.39,35.94 104.1,35.65 C50.1 | C50.1 v103.5,37.08
  Bottom 0.203: JP37.2 107.31,54.99 105.03,54.99 103.25,53.21 103.25,37.34 v103.5,37.08
3.3V6  (via drill 0.38)
  Top 0.203: SJ7.1 14.43,60.4 15.58,61.56 C59.1 | JP43.2 22.86,61.21 22.54,61.53 22.54,61.85 | U14.5 22.54,61.85 | 22.54,61.85 18.03,61.85 17.74,61.56 C59.1 | C59.1 v17.14,62.99
  Bottom 0.203: JP44.2 20.95,80.9 18.67,80.9 16.89,79.12 16.89,63.25 v17.14,62.99
3.3V7  (via drill 0.38)
  Top 0.203: SJ8.1 57.61,60.4 58.76,61.56 C68.1 | JP50.2 66.04,61.21 65.72,61.53 65.72,61.85 | U16.5 65.72,61.85 | 65.72,61.85 61.21,61.85 60.92,61.56 C68.1 | C68.1 v60.33,62.99
  Bottom 0.203: JP51.2 64.14,80.9 61.85,80.9 60.07,79.12 60.07,63.25 v60.33,62.99
3.3V8  (via drill 0.38)
  Top 0.203: SJ9.1 100.79,60.4 101.94,61.56 C77.1 | JP57.2 109.22,61.21 108.9,61.53 108.9,61.85 | U18.5 108.9,61.85 | 108.9,61.85 104.39,61.85 104.1,61.56 C77.1 | C77.1 v103.5,62.99
  Bottom 0.203: JP58.2 107.31,80.9 105.03,80.9 103.25,79.12 103.25,63.25 v103.5,62.99
3.3V9  (via drill 0.38)
  Top 0.203: SJ10.1 14.43,86.31 15.58,87.46 C86.1 | JP64.2 22.86,87.12 22.54,87.44 22.54,87.76 | U20.5 22.54,87.76 | 22.54,87.76 18.03,87.76 17.74,87.46 C86.1 | C86.1 v17.14,88.9
  Bottom 0.203: JP65.2 20.95,106.81 18.67,106.81 16.89,105.03 16.89,89.15 v17.14,88.9
3.3V10  (via drill 0.38)
  Top 0.203: SJ11.1 57.61,86.31 58.76,87.46 C95.1 | JP71.2 66.04,87.12 65.72,87.44 65.72,87.76 | U22.5 65.72,87.76 | 65.72,87.76 61.21,87.76 60.92,87.46 C95.1 | C95.1 v60.33,88.9
  Bottom 0.203: JP72.2 64.14,106.81 61.85,106.81 60.07,105.03 60.07,89.15 v60.33,88.9
3.3V11  (via drill 0.38)
  Top 0.203: SJ12.1 100.79,86.31 101.94,87.46 C104.1 | JP78.2 109.22,87.12 108.9,87.44 108.9,87.76 | U24.5 108.9,87.76 | 108.9,87.76 104.39,87.76 104.1,87.46 C104.1 | C104.1 v103.5,88.9
  Bottom 0.203: JP79.2 107.31,106.81 105.03,106.81 103.25,105.03 103.25,89.15 v103.5,88.9
5V  (via drill 0.38)
  Top 0.203: 12.75,10.16 SJ1.3 12.7,10.67 13.55,11.52 R4.2 15.24,11.94 16.51,13.21 20.64,13.21 | v24.26,27.56 24.26,26.79 F1.2 v25.78,24.64 25.78,22.23 26.49,21.52 U1.2 | U1.7 26.17,19.06 25.03,19.06 v24.64,18.67 24.26,18.29 C8.A 23.37,17.02 23.11,16.76 23.11,15.88 22.54,15.3 U2.1 22.57,14.48 22.57,13.21 | JP1.3 23.24,10.29 23.24,12.83 22.86,13.21 22.57,13.21 | 22.57,13.21 20.64,13.21 | U2.3 20.64,13.21
  Bottom 0.203: v24.26,27.56 24.26,29.84 JP2.3 | v25.78,24.64 25.4,24.64 24.13,23.37 24.13,19.18 v24.64,18.67
5V1  (via drill 0.38)
  Top 0.203: 55.93,10.16 SJ2.3 55.88,10.67 56.73,11.52 R8.2 58.42,11.94 59.69,13.21 63.82,13.21 | v67.44,27.56 67.44,26.79 F2.2 v68.96,24.64 68.96,22.23 69.67,21.52 U3.2 | U3.7 69.35,19.06 68.21,19.06 v67.82,18.67 67.44,18.29 C17.A 66.55,17.02 66.29,16.76 66.29,15.88 65.72,15.3 U4.1 65.75,14.48 65.75,13.21 | JP4.3 66.42,10.29 66.42,12.83 66.04,13.21 65.75,13.21 | 65.75,13.21 63.82,13.21 | U4.3 63.82,13.21
  Bottom 0.203: v67.44,27.56 67.44,29.84 JP9.3 | v68.96,24.64 68.58,24.64 67.31,23.37 67.31,19.18 v67.82,18.67
5V2  (via drill 0.38)
  Top 0.203: 99.11,10.16 SJ3.3 99.06,10.67 99.91,11.52 R12.2 101.6,11.94 102.87,13.21 107,13.21 | v110.62,27.56 110.62,26.79 F3.2 v112.14,24.64 112.14,22.23 112.85,21.52 U5.2 | U5.7 112.53,19.06 111.39,19.06 v111,18.67 110.62,18.29 C26.A 109.73,17.02 109.47,16.76 109.47,15.88 108.9,15.3 U6.1 108.93,14.48 108.93,13.21 | JP15.3 109.6,10.29 109.6,12.83 109.22,13.21 108.93,13.21 | 108.93,13.21 107,13.21 | U6.3 107,13.21
  Bottom 0.203: v110.62,27.56 110.62,29.84 JP16.3 | v112.14,24.64 111.76,24.64 110.49,23.37 110.49,19.18 v111,18.67
5V3  (via drill 0.38)
  Top 0.203: 12.75,36.07 SJ4.3 12.7,36.58 13.55,37.43 R16.2 15.24,37.85 16.51,39.12 20.64,39.12 | v24.26,53.47 24.26,52.7 F4.2 v25.78,50.55 25.78,48.13 26.49,47.42 U7.2 | U7.7 26.17,44.97 25.03,44.97 v24.64,44.58 24.26,44.2 C35.A 23.37,42.93 23.11,42.67 23.11,41.78 22.54,41.21 U8.1 22.57,40.39 22.57,39.12 | JP22.3 23.24,36.2 23.24,38.73 22.86,39.12 22.57,39.12 | 22.57,39.12 20.64,39.12 | U8.3 20.64,39.12
  Bottom 0.203: v24.26,53.47 24.26,55.75 JP23.3 | v25.78,50.55 25.4,50.55 24.13,49.28 24.13,45.09 v24.64,44.58
5V4  (via drill 0.38)
  Top 0.203: 55.93,36.07 SJ5.3 55.88,36.58 56.73,37.43 R20.2 58.42,37.85 59.69,39.12 63.82,39.12 | v67.44,53.47 67.44,52.7 F5.2 v68.96,50.55 68.96,48.13 69.67,47.42 U9.2 | U9.7 69.35,44.97 68.21,44.97 v67.82,44.58 67.44,44.2 C44.A 66.55,42.93 66.29,42.67 66.29,41.78 65.72,41.21 U10.1 65.75,40.39 65.75,39.12 | JP29.3 66.42,36.2 66.42,38.73 66.04,39.12 65.75,39.12 | 65.75,39.12 63.82,39.12 | U10.3 63.82,39.12
  Bottom 0.203: v67.44,53.47 67.44,55.75 JP30.3 | v68.96,50.55 68.58,50.55 67.31,49.28 67.31,45.09 v67.82,44.58
5V5  (via drill 0.38)
  Top 0.203: 99.11,36.07 SJ6.3 99.06,36.58 99.91,37.43 R24.2 101.6,37.85 102.87,39.12 107,39.12 | v110.62,53.47 110.62,52.7 F6.2 v112.14,50.55 112.14,48.13 112.85,47.42 U11.2 | U11.7 112.53,44.97 111.39,44.97 v111,44.58 110.62,44.2 C53.A 109.73,42.93 109.47,42.67 109.47,41.78 108.9,41.21 U12.1 108.93,40.39 108.93,39.12 | JP36.3 109.6,36.2 109.6,38.73 109.22,39.12 108.93,39.12 | 108.93,39.12 107,39.12 | U12.3 107,39.12
  Bottom 0.203: v110.62,53.47 110.62,55.75 JP37.3 | v112.14,50.55 111.76,50.55 110.49,49.28 110.49,45.09 v111,44.58
5V6  (via drill 0.38)
  Top 0.203: 12.75,61.98 SJ7.3 12.7,62.48 13.55,63.33 R28.2 15.24,63.75 16.51,65.02 20.64,65.02 | v24.26,79.38 24.26,78.61 F7.2 v25.78,76.45 25.78,74.04 26.49,73.33 U13.2 | U13.7 26.17,70.87 25.03,70.87 v24.64,70.48 24.26,70.1 C62.A 23.37,68.83 23.11,68.58 23.11,67.69 22.54,67.12 U14.1 22.57,66.29 22.57,65.02 | JP43.3 23.24,62.1 23.24,64.64 22.86,65.02 22.57,65.02 | 22.57,65.02 20.64,65.02 | U14.3 20.64,65.02
  Bottom 0.203: v24.26,79.38 24.26,81.66 JP44.3 | v25.78,76.45 25.4,76.45 24.13,75.18 24.13,70.99 v24.64,70.48
5V7  (via drill 0.38)
  Top 0.203: 55.93,61.98 SJ8.3 55.88,62.48 56.73,63.33 R32.2 58.42,63.75 59.69,65.02 63.82,65.02 | v67.44,79.38 67.44,78.61 F8.2 v68.96,76.45 68.96,74.04 69.67,73.33 U15.2 | U15.7 69.35,70.87 68.21,70.87 v67.82,70.48 67.44,70.1 C71.A 66.55,68.83 66.29,68.58 66.29,67.69 65.72,67.12 U16.1 65.75,66.29 65.75,65.02 | JP50.3 66.42,62.1 66.42,64.64 66.04,65.02 65.75,65.02 | 65.75,65.02 63.82,65.02 | U16.3 63.82,65.02
  Bottom 0.203: v67.44,79.38 67.44,81.66 JP51.3 | v68.96,76.45 68.58,76.45 67.31,75.18 67.31,70.99 v67.82,70.48
5V8  (via drill 0.38)
  Top 0.203: 99.11,61.98 SJ9.3 99.06,62.48 99.91,63.33 R36.2 101.6,63.75 102.87,65.02 107,65.02 | v110.62,79.38 110.62,78.61 F9.2 v112.14,76.45 112.14,74.04 112.85,73.33 U17.2 | U17.7 112.53,70.87 111.39,70.87 v111,70.48 110.62,70.1 C80.A 109.73,68.83 109.47,68.58 109.47,67.69 108.9,67.12 U18.1 108.93,66.29 108.93,65.02 | JP57.3 109.6,62.1 109.6,64.64 109.22,65.02 108.93,65.02 | 108.93,65.02 107,65.02 | U18.3 107,65.02
  Bottom 0.203: v110.62,79.38 110.62,81.66 JP58.3 | v112.14,76.45 111.76,76.45 110.49,75.18 110.49,70.99 v111,70.48
5V9  (via drill 0.38)
  Top 0.203: 12.75,87.88 SJ10.3 12.7,88.39 13.55,89.24 R40.2 15.24,89.66 16.51,90.93 20.64,90.93 | v24.26,105.28 24.26,104.52 F10.2 v25.78,102.36 25.78,99.95 26.49,99.24 U19.2 | U19.7 26.17,96.78 25.03,96.78 v24.64,96.39 24.26,96.01 C89.A 23.37,94.74 23.11,94.49 23.11,93.6 22.54,93.03 U20.1 22.57,92.2 22.57,90.93 | JP64.3 23.24,88.01 23.24,90.55 22.86,90.93 22.57,90.93 | 22.57,90.93 20.64,90.93 | U20.3 20.64,90.93
  Bottom 0.203: v24.26,105.28 24.26,107.57 JP65.3 | v25.78,102.36 25.4,102.36 24.13,101.09 24.13,96.9 v24.64,96.39
5V10  (via drill 0.38)
  Top 0.203: 55.93,87.88 SJ11.3 55.88,88.39 56.73,89.24 R44.2 58.42,89.66 59.69,90.93 63.82,90.93 | v67.44,105.28 67.44,104.52 F11.2 v68.96,102.36 68.96,99.95 69.67,99.24 U21.2 | U21.7 69.35,96.78 68.21,96.78 v67.82,96.39 67.44,96.01 C98.A 66.55,94.74 66.29,94.49 66.29,93.6 65.72,93.03 U22.1 65.75,92.2 65.75,90.93 | JP71.3 66.42,88.01 66.42,90.55 66.04,90.93 65.75,90.93 | 65.75,90.93 63.82,90.93 | U22.3 63.82,90.93
  Bottom 0.203: v67.44,105.28 67.44,107.57 JP72.3 | v68.96,102.36 68.58,102.36 67.31,101.09 67.31,96.9 v67.82,96.39
5V11  (via drill 0.38)
  Top 0.203: 99.11,87.88 SJ12.3 99.06,88.39 99.91,89.24 R48.2 101.6,89.66 102.87,90.93 107,90.93 | v110.62,105.28 110.62,104.52 F12.2 v112.14,102.36 112.14,99.95 112.85,99.24 U23.2 | U23.7 112.53,96.78 111.39,96.78 v111,96.39 110.62,96.01 C107.A 109.73,94.74 109.47,94.49 109.47,93.6 108.9,93.03 U24.1 108.93,92.2 108.93,90.93 | JP78.3 109.6,88.01 109.6,90.55 109.22,90.93 108.93,90.93 | 108.93,90.93 107,90.93 | U24.3 107,90.93
  Bottom 0.203: v110.62,105.28 110.62,107.57 JP79.3 | v112.14,102.36 111.76,102.36 110.49,101.09 110.49,96.9 v111,96.39
AREF
  Top 0.203: U1.42 30.27,25.1 29.84,25.53 29.84,26.76 C1.1
AREF1
  Top 0.203: U3.42 73.45,25.1 73.03,25.53 73.03,26.76 C10.1
AREF2
  Top 0.203: U5.42 116.63,25.1 116.2,25.53 116.2,26.76 C19.1
AREF3
  Top 0.203: U7.42 30.27,51.01 29.84,51.44 29.84,52.67 C28.1
AREF4
  Top 0.203: U9.42 73.45,51.01 73.03,51.44 73.03,52.67 C37.1
AREF5
  Top 0.203: U11.42 116.63,51.01 116.2,51.44 116.2,52.67 C46.1
AREF6
  Top 0.203: U13.42 30.27,76.92 29.84,77.34 29.84,78.57 C55.1
AREF7
  Top 0.203: U15.42 73.45,76.92 73.03,77.34 73.03,78.57 C64.1
AREF8
  Top 0.203: U17.42 116.63,76.92 116.2,77.34 116.2,78.57 C73.1
AREF9
  Top 0.203: U19.42 30.27,102.83 29.84,103.25 29.84,104.48 C82.1
AREF10
  Top 0.203: U21.42 73.45,102.83 73.03,103.25 73.03,104.48 C91.1
AREF11
  Top 0.203: U23.42 116.63,102.83 116.2,103.25 116.2,104.48 C100.1
D+
  Top 0.203: R2.1 20.7,20.95 19.3,19.56 X1.D+
D+1
  Top 0.203: R6.1 63.88,20.95 62.48,19.56 X2.D+
D+2
  Top 0.203: R10.1 107.06,20.95 105.66,19.56 X3.D+
D+3
  Top 0.203: R14.1 20.7,46.86 19.3,45.47 X4.D+
D+4
  Top 0.203: R18.1 63.88,46.86 62.48,45.47 X5.D+
D+5
  Top 0.203: R22.1 107.06,46.86 105.66,45.47 X6.D+
D+6
  Top 0.203: R26.1 20.7,72.77 19.3,71.37 X7.D+
D+7
  Top 0.203: R30.1 63.88,72.77 62.48,71.37 X8.D+
D+8
  Top 0.203: R34.1 107.06,72.77 105.66,71.37 X9.D+
D+9
  Top 0.203: R38.1 20.7,98.68 19.3,97.28 X10.D+
D+10
  Top 0.203: R42.1 63.88,98.68 62.48,97.28 X11.D+
D+11
  Top 0.203: R46.1 107.06,98.68 105.66,97.28 X12.D+
D-
  Top 0.203: R3.1 20.83,22.61 20.07,21.84 20.07,21.08 19.34,20.36 X1.D-
D-1
  Top 0.203: R7.1 64.01,22.61 63.25,21.84 63.25,21.08 62.52,20.36 X2.D-
D-2
  Top 0.203: R11.1 107.19,22.61 106.43,21.84 106.43,21.08 105.7,20.36 X3.D-
D-3
  Top 0.203: R15.1 20.83,48.51 20.07,47.75 20.07,46.99 19.34,46.27 X4.D-
D-4
  Top 0.203: R19.1 64.01,48.51 63.25,47.75 63.25,46.99 62.52,46.27 X5.D-
D-5
  Top 0.203: R23.1 107.19,48.51 106.43,47.75 106.43,46.99 105.7,46.27 X6.D-
D-6
  Top 0.203: R27.1 20.83,74.42 20.07,73.66 20.07,72.9 19.34,72.17 X7.D-
D-7
  Top 0.203: R31.1 64.01,74.42 63.25,73.66 63.25,72.9 62.52,72.17 X8.D-
D-8
  Top 0.203: R35.1 107.19,74.42 106.43,73.66 106.43,72.9 105.7,72.17 X9.D-
D-9
  Top 0.203: R39.1 20.83,100.33 20.07,99.57 20.07,98.81 19.34,98.08 X10.D-
D-10
  Top 0.203: R43.1 64.01,100.33 63.25,99.57 63.25,98.81 62.52,98.08 X11.D-
D-11
  Top 0.203: R47.1 107.19,100.33 106.43,99.57 106.43,98.81 105.7,98.08 X12.D-
GND  (via drill 0.38, 0.38 pad 0.38)
  Top 0.203: U1.5 26.17,20.06 26.16,20.07 | U1.23 36.11,17.1 36.45,16.76
  other vias: 20.07,18.67 18.54,8.89 25.02,23.11 36.32,24.64 43.18,28.45 45.85,14.86
  pour Top (isolate 0.203): 49.53,32.26 10.16,32.26 10.16,6.86 49.53,6.86
  pour Bottom (isolate 0.203): 49.53,32.26 49.53,6.86 10.16,6.86 10.16,32.26
GND1  (via drill 0.38, 0.38 pad 0.38)
  Top 0.203: U3.5 69.35,20.06 69.34,20.07 | U3.23 79.29,17.1 79.63,16.76
  other vias: 63.25,18.67 61.72,8.89 68.2,23.11 79.5,24.64 86.36,28.45 89.03,14.86
  pour Top (isolate 0.203): 92.71,32.26 53.34,32.26 53.34,6.86 92.71,6.86
  pour Bottom (isolate 0.203): 92.71,32.26 92.71,6.86 53.34,6.86 53.34,32.26
GND2  (via drill 0.38, 0.38 pad 0.38)
  Top 0.203: U5.5 112.53,20.06 112.52,20.07 | U5.23 122.47,17.1 122.81,16.76
  other vias: 106.43,18.67 104.9,8.89 111.38,23.11 122.68,24.64 129.54,28.45 132.21,14.86
  pour Top (isolate 0.203): 135.89,32.26 96.52,32.26 96.52,6.86 135.89,6.86
  pour Bottom (isolate 0.203): 135.89,32.26 135.89,6.86 96.52,6.86 96.52,32.26
GND3  (via drill 0.38, 0.38 pad 0.38)
  Top 0.203: U7.5 26.17,45.97 26.16,45.97 | U7.23 36.11,43.01 36.45,42.67
  other vias: 20.07,44.58 18.54,34.8 25.02,49.02 36.32,50.55 43.18,54.36 45.85,40.77
  pour Top (isolate 0.203): 49.53,58.17 10.16,58.17 10.16,32.77 49.53,32.77
  pour Bottom (isolate 0.203): 49.53,58.17 49.53,32.77 10.16,32.77 10.16,58.17
GND4  (via drill 0.38, 0.38 pad 0.38)
  Top 0.203: U9.5 69.35,45.97 69.34,45.97 | U9.23 79.29,43.01 79.63,42.67
  other vias: 63.25,44.58 61.72,34.8 68.2,49.02 79.5,50.55 86.36,54.36 89.03,40.77
  pour Top (isolate 0.203): 92.71,58.17 53.34,58.17 53.34,32.77 92.71,32.77
  pour Bottom (isolate 0.203): 92.71,58.17 92.71,32.77 53.34,32.77 53.34,58.17
GND5  (via drill 0.38, 0.38 pad 0.38)
  Top 0.203: U11.5 112.53,45.97 112.52,45.97 | U11.23 122.47,43.01 122.81,42.67
  other vias: 106.43,44.58 104.9,34.8 111.38,49.02 122.68,50.55 129.54,54.36 132.21,40.77
  pour Top (isolate 0.203): 135.89,58.17 96.52,58.17 96.52,32.77 135.89,32.77
  pour Bottom (isolate 0.203): 135.89,58.17 135.89,32.77 96.52,32.77 96.52,58.17
GND6  (via drill 0.38, 0.38 pad 0.38)
  Top 0.203: U13.5 26.17,71.87 26.16,71.88 | U13.23 36.11,68.92 36.45,68.58
  other vias: 20.07,70.48 18.54,60.71 25.02,74.93 36.32,76.45 43.18,80.26 45.85,66.67
  pour Top (isolate 0.203): 49.53,84.07 10.16,84.07 10.16,58.67 49.53,58.67
  pour Bottom (isolate 0.203): 49.53,84.07 49.53,58.67 10.16,58.67 10.16,84.07
GND7  (via drill 0.38, 0.38 pad 0.38)
  Top 0.203: U15.5 69.35,71.87 69.34,71.88 | U15.23 79.29,68.92 79.63,68.58
  other vias: 63.25,70.48 61.72,60.71 68.2,74.93 79.5,76.45 86.36,80.26 89.03,66.67
  pour Top (isolate 0.203): 92.71,84.07 53.34,84.07 53.34,58.67 92.71,58.67
  pour Bottom (isolate 0.203): 92.71,84.07 92.71,58.67 53.34,58.67 53.34,84.07
GND8  (via drill 0.38, 0.38 pad 0.38)
  Top 0.203: U17.5 112.53,71.87 112.52,71.88 | U17.23 122.47,68.92 122.81,68.58
  other vias: 106.43,70.48 104.9,60.71 111.38,74.93 122.68,76.45 129.54,80.26 132.21,66.67
  pour Top (isolate 0.203): 135.89,84.07 96.52,84.07 96.52,58.67 135.89,58.67
  pour Bottom (isolate 0.203): 135.89,84.07 135.89,58.67 96.52,58.67 96.52,84.07
GND9  (via drill 0.38, 0.38 pad 0.38)
  Top 0.203: U19.5 26.17,97.78 26.16,97.79 | U19.23 36.11,94.82 36.45,94.49
  other vias: 20.07,96.39 18.54,86.61 25.02,100.84 36.32,102.36 43.18,106.17 45.85,92.58
  pour Top (isolate 0.203): 49.53,109.98 10.16,109.98 10.16,84.58 49.53,84.58
  pour Bottom (isolate 0.203): 49.53,109.98 49.53,84.58 10.16,84.58 10.16,109.98
GND10  (via drill 0.38, 0.38 pad 0.38)
  Top 0.203: U21.5 69.35,97.78 69.34,97.79 | U21.23 79.29,94.82 79.63,94.49
  other vias: 63.25,96.39 61.72,86.61 68.2,100.84 79.5,102.36 86.36,106.17 89.03,92.58
  pour Top (isolate 0.203): 92.71,109.98 53.34,109.98 53.34,84.58 92.71,84.58
  pour Bottom (isolate 0.203): 92.71,109.98 92.71,84.58 53.34,84.58 53.34,109.98
GND11  (via drill 0.38, 0.38 pad 0.38)
  Top 0.203: U23.5 112.53,97.78 112.52,97.79 | U23.23 122.47,94.82 122.81,94.49
  other vias: 106.43,96.39 104.9,86.61 111.38,100.84 122.68,102.36 129.54,106.17 132.21,92.58